# Altium PCB PCB2.PcbDoc
Units mm, origin at the board's own origin, x right, y up, seen from the top; angles counter-clockwise.
Board outline 152.4 x 101.6 mm, 2 copper layers (Top Layer, Bottom Layer); 31 components, 24 nets, 94 pads, 0 vias.
Unrouted connection lines stored in the file: 10.
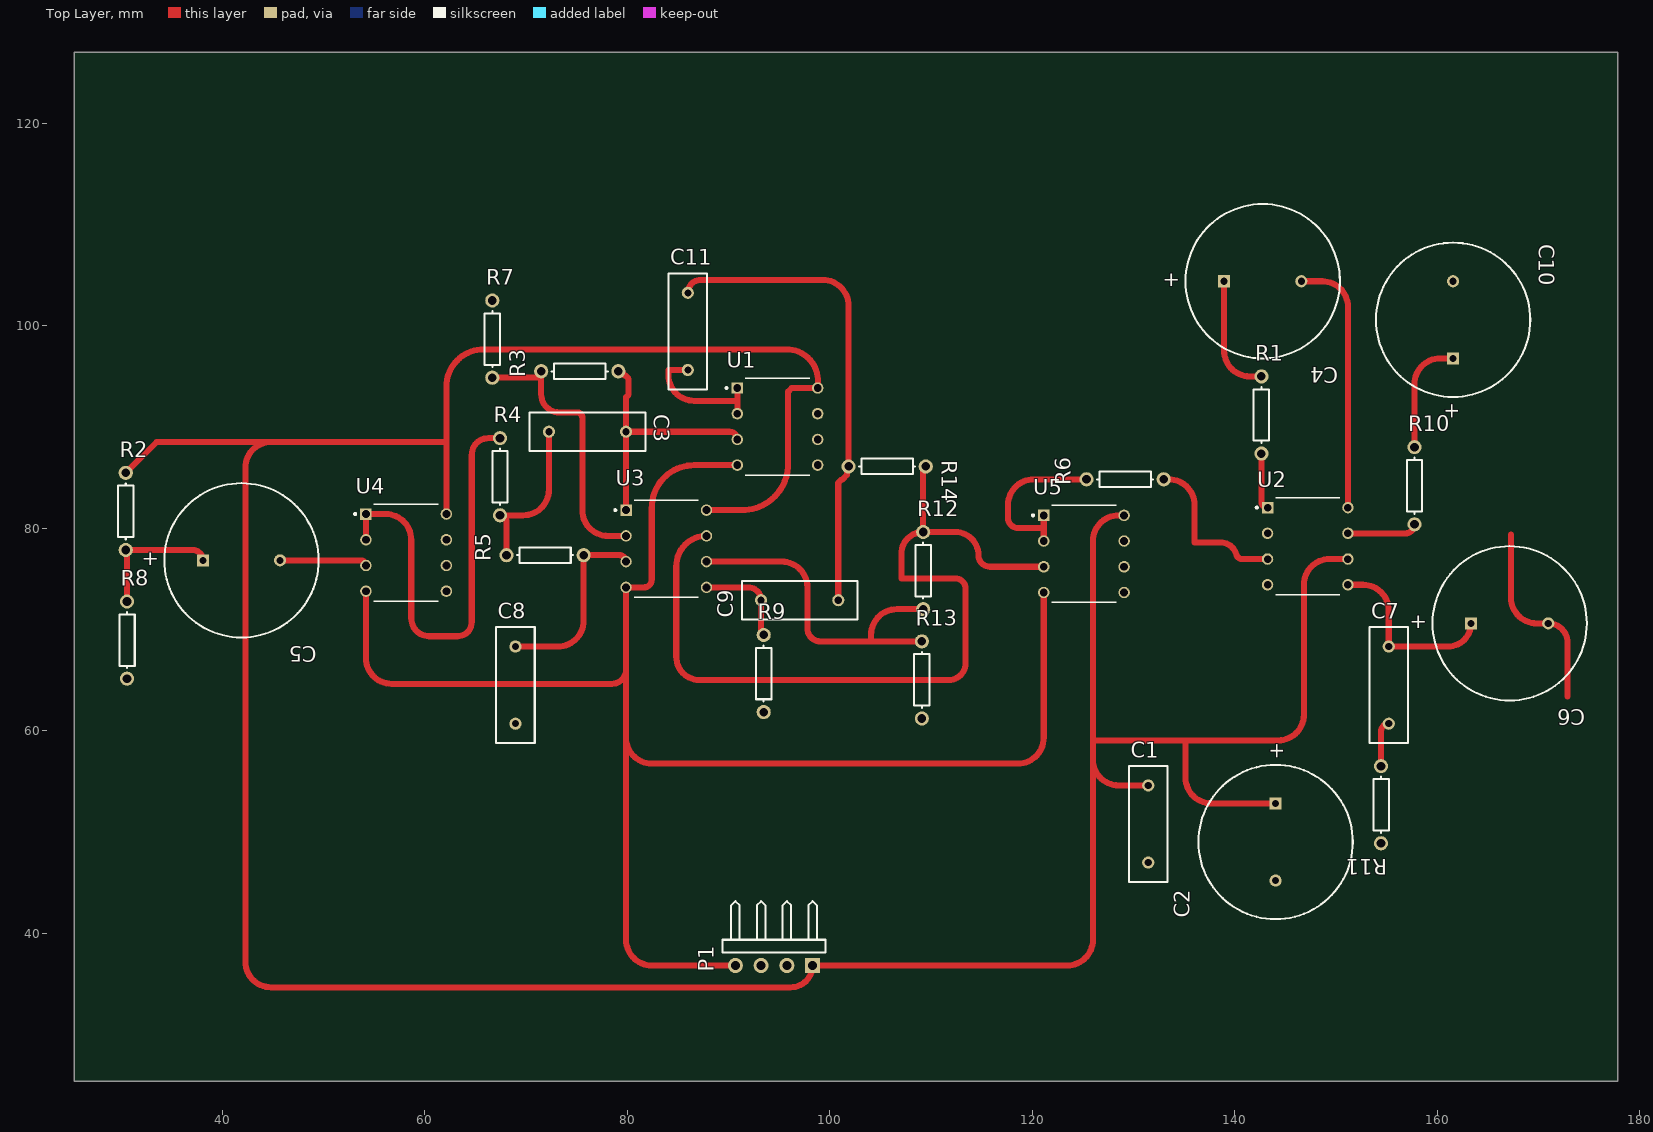
[diagram p0: Top Layer view]
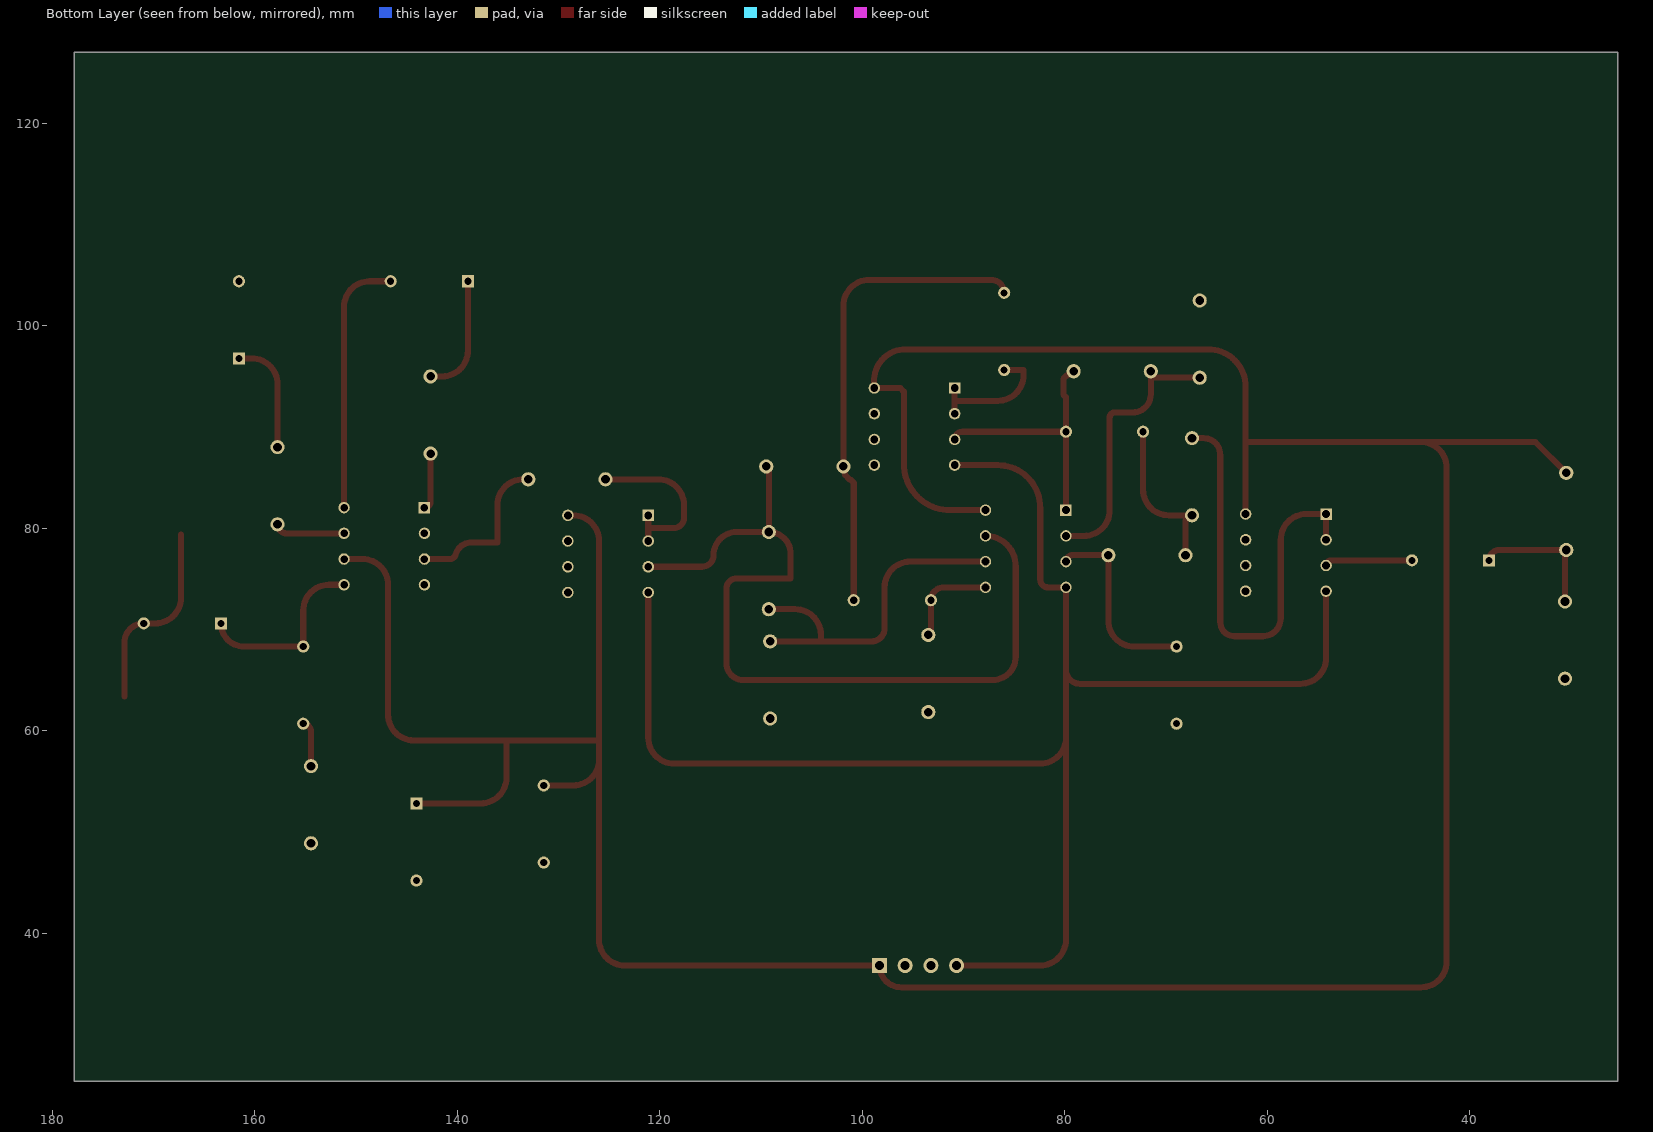
[diagram p1: Bottom Layer view, seen from below]

## Layer stack, top to bottom
Top Solder: solder mask 0.0102, Solder Resist, Dk 3.5
Top Layer: signal copper 0.0356
Dielectric 1: dielectric 0.32, FR-4, Dk 4.8
Bottom Layer: signal copper 0.0356
Bottom Solder: solder mask 0.0102, Solder Resist, Dk 3.5

## Board outline
25.4,25.4 177.8,25.4 177.8,127 25.4,127

## Design rules (kind name [scope] priority, off if disabled: settings)
Clearance [All] p1: gap=0.254 ignorepadtopadclearanceinfootprint=FALSE except(0: Arc-Hole Track-Hole SMDPad-Hole THPad-Hole Via-Hole Fill-Hole Poly-Hole Region-Hole Text-Hole; 1.3: Arc-Fill Arc-Poly Arc-Region Track-Fill Track-Poly Track-Region)
HoleSize [All] p1: absolutevalues=TRUE maxlimit=4 minlimit=3 maxpercent=80.000 minpercent=20.000
HoleToHoleClearance [All] p1: gap=0.3 allowstackedmicrovias=TRUE
PolygonConnect [All] p1: connectstyle=Relief reliefconductorwidth=0.254 reliefentries=4 polygonreliefangle="90 Angle" airgapwidth=0.254
RoutingVias [All] p1: holewidth=0.711 width=1.27 viastyle="Through Hole" minholewidth=0.711 minwidth=1.27 maxholewidth=0.711 maxwidth=1.27
SolderMaskExpansion [All] p1: expansion=0.102 istentingtop=FALSE
Width [All] p1: maxlimit=1.3 minlimit=0.254 preferedwidth=1.3 bottomlayer_maxwidth=0.254 bottomlayer_prefwidth=0.254 minimp=50.000000 maximp=50.000000 favimp=50.000000
28 further rules are at their usual default settings.

## Components (designator, comment, footprint, x,y, rotation, side; value= is the part's Value field where it differs from the comment)
C1 "Cap" RAD-0.3 131.445,50.8 r90 top value=100pF
C2 "Cap Pol1" RB7.6-15 144.018,49.022 r90 top value=100pF
C3 "Cap" RAD-0.3 76.073,89.535 r0 top value=100pF
C4 "Cap Pol1" RB7.6-15 142.748,104.394 r180 top value=100pF
C5 "Cap Pol1" RB7.6-15 41.91,76.835 r180 top value=100pF
C6 "Cap Pol1" RB7.6-15 167.132,70.612 r180 top value=100pF
C7 "Cap" RAD-0.3 155.194,64.516 r90 top value=100pF
C8 "Cap" RAD-0.3 68.961,64.516 r90 top value=100pF
C9 "Cap" RAD-0.3 97.028,72.898 r180 top value=100pF
C10 "Cap Pol1" RB7.6-15 161.544,100.584 r270 top value=100pF
C11 "Cap" RAD-0.3 85.979,99.441 r90 top value=100pF
P1 "Header 4H" HDR1X4H 98.298,36.83 r180 top
R1 "Res1" AXIAL-0.3 142.621,91.186 r90 top value=1K
R2 "Res1" AXIAL-0.3 30.48,81.661 r90 top value=1K
R3 "Res1" AXIAL-0.3 75.311,95.504 r180 top value=1K
R4 "Res1" AXIAL-0.3 67.437,85.09 r90 top value=1K
R5 "Res1" AXIAL-0.3 71.882,77.343 r180 top value=1K
R6 "Res1" AXIAL-0.3 129.159,84.836 r180 top value=1K
R7 "Res1" AXIAL-0.3 66.675,98.679 r90 top value=1K
R8 "Res1" AXIAL-0.3 30.607,68.961 r90 top value=1K
R9 "Res1" AXIAL-0.3 93.472,65.659 r90 top value=1K
R10 "Res1" AXIAL-0.3 157.734,84.201 r90 top value=1K
R11 "Res1" AXIAL-0.3 154.432,52.705 r270 top value=1K
R12 "Res1" AXIAL-0.3 109.22,75.819 r90 top value=1K
R13 "Res1" AXIAL-0.3 109.093,65.024 r90 top value=1K
R14 "Res1" AXIAL-0.3 105.664,86.106 r0 top value=1K
U1 "LM358PE3" DIP794W45P254L959H508Q8#1 94.836,90.043 r0 top
U2 "LM386N-3/NOPB" DIP794W45P254L959H508Q8#2 147.193,78.232 r0 top
U3 "TL072BCP" DIP794W45P254L959H508Q8#1 83.853,77.978 r0 top
U4 "LM358PE3" DIP794W45P254L959H508Q8#1 58.166,77.597 r0 top
U5 "LM358PE3" DIP794W45P254L959H508Q8#1 125.095,77.47 r0 top

## Footprints (in the part's own frame and the unit in brackets; to place one, negate y for a bottom-side part, rotate by r counter-clockwise, add the part's x,y. Pads: shape width x height; smd on the part's side, far side on the other; paste and mask are expansions set on the pad)
AXIAL-0.3 [mm] "Axial Device, Thru-Hole; 2 Leads; 0.3 in Pin Spacing"
  round 1.4 hole 0.85: 1(-3.81,0) 2(3.81,0)
  silkscreen extent -2.77,-0.76 2.77,0.76
DIP794W45P254L959H508Q8#1 [mm]
  rect 1.13x1.13 hole 0.78: 1(-3.97,3.81)
  round 1.13 hole 0.78: 2(-3.97,1.27) 3(-3.97,-1.27) 4(-3.97,-3.81) 5(3.97,-3.81) 6(3.97,-1.27) 7(3.97,1.27) 8(3.97,3.81)
  silkscreen extent -5.13,-4.8 3.17,4.8
DIP794W45P254L959H508Q8#2 [mm]
  rect 1.13x1.13 hole 0.74: 1(-3.97,3.81)
  round 1.13 hole 0.74: 2(-3.97,1.27) 3(-3.97,-1.27) 4(-3.97,-3.81) 5(3.97,-3.81) 6(3.97,-1.27) 7(3.97,1.27) 8(3.97,3.81)
  silkscreen extent -5.13,-4.8 3.17,4.8
HDR1X4H [mm] "Connector; Header; 4 Position; Right Angle"
  rect 1.5x1.5 hole 0.9: 1(0,0)
  round 1.5 hole 0.9: 2(2.54,0) 3(5.08,0) 4(7.62,0)
  silkscreen extent -1.27,-6.35 8.89,-1.27
RAD-0.3 [mm] "Radial Cap, Thru-Hole; 2 Leads; 0.3 in Pin Spacing"
  round 1.2 hole 0.7: 1(-3.81,0) 2(3.81,0)
  silkscreen extent -5.71,-1.91 5.71,1.91
RB7.6-15 [mm] "Polarized Capacitor (Radial); 2 Leads"
  rect 1.2x1.2 hole 0.7: 1(3.81,0)
  round 1.2 hole 0.7: 2(-3.81,0)
  silkscreen extent -7.62,-7.62 7.62,7.62

## Part data
C1 C3 C7 C8 C9 C11: "Capacitor", LatestRevisionDate=17-Jul-2002, LatestRevisionNote="Re-released for DXP Platform.", PackageDescription="Radial Cap, Thru-Hole; 2 Leads; 0.3 in Pin Spacing", PackageReference=RAD-0.3, Published=8-Jun-2000, Publisher="Altium Limited"
C2 C4 C5 C6 C10: "Polarized Capacitor (Radial)", LatestRevisionDate=17-Jul-2002, LatestRevisionNote="Re-released for DXP Platform.", PackageDescription="Polarized Capacitor (Radial); 2 Leads", PackageReference=RB7.6-15, Published=8-Jun-2000, Publisher="Altium Limited"
P1: "Header, 4-Pin, Right Angle", LatestRevisionDate=17-Jul-2002, LatestRevisionNote="Re-released for DXP Platform.", Publisher="Altium Limited"
R1 R2 R3 R4 R5 R6 R7 R8 R9 R10 R11 R12 R13 R14: "Resistor", LatestRevisionDate=17-Jul-2002, LatestRevisionNote="Re-released for DXP Platform.", PackageDescription="Axial Device, Thru-Hole; 2 Leads; 0.3 in Pin Spacing", PackageReference=AXIAL-0.3, Published=8-Jun-2000, Publisher="Altium Limited"
U1 U2 U4 U5: Package=None, Availability=Unavailable, Price=None
  U1 U4 U5: MP=LM358PE3
  U2: MP=LM386N-3/NOPB
U3: "Dual low-noise JFET-input low offset operational amplifier 8-PDIP 0 to 70", Package="PDIP-8 Texas", Availability=Warning, Check_prices=https://www.snapeda.com/parts/TL072BCP/Texas%20Instruments/view-part/511536/?ref=eda, MF="Texas Instruments", MP=TL072BCP, Price=None, Purchase-URL=https://pricing.snapeda.com/search/part/TL072BCP/?ref=eda, SnapEDA_Link=https://www.snapeda.com/parts/TL072BCP/Texas%20Instruments/view-part/511536/?ref=snap

## Nets (pads, with @x,y where several pads share a name; then routed paths per layer and width w, separated by ;. In a path a pad name is that pad's centre, name@x,y a point inside that pad or via, vN(x,y) a via of type N, cw(c..) or ccw(c..) an arc to the next point about the centre after c; other vN are vias at no path point)
GND: C1.1 C2.2 C8.1 C10.2 R7.2 R8.1 R9.1 R11.2 R13.1 U2.2 U2.4
NetC1_2: C1.2 C2.1 P1.1 R2.2 U1.8 U2.6 U3.8 U4.8 U5.8 | length 415.8
  Top Layer w0.6: R2.2 33.528,88.519 44.831,88.519 ; U4.8 62.136,88.519 ; U3.8 91.313,81.788 ; U1.8 96.236,93.853 95.885,93.502 95.885,86.36 ; U5.8 U5.8@128.524,81.28 ; C1.2 128.524,54.61 ; C2.1 137.668,52.832 ; U2.6 149.352,76.962 ; 42.291,37.211 ccw(c44.831,37.211) 44.831,34.671 ; 42.291,37.211 ccw(c44.831,37.211) 44.831,34.671 ; 42.291,37.211 42.291,85.979 ; 42.291,85.979 cw(c44.831,85.979) 44.831,88.519 ; 42.291,85.979 cw(c44.831,85.979) 44.831,88.519 ; 44.831,34.671 96.139,34.671 ; 44.831,88.519 62.136,88.519 ; 62.136,88.519 62.136,93.98 ; 62.136,93.98 cw(c65.819,93.98) 65.819,97.663 ; 62.136,93.98 cw(c65.819,93.98) 65.819,97.663 ; 65.819,97.663 95.742,97.663 ; 91.313,81.788 ccw(c91.313,86.36) 95.885,86.36 ; 91.313,81.788 ccw(c91.313,86.36) 95.885,86.36 ; 95.742,97.663 cw(c95.742,94.574) 98.749,93.867 ccw(c95.742,94.574) 95.742,97.663 ; 96.139,34.671 ccw(c96.139,36.83) P1.1 ; 96.139,34.671 ccw(c96.139,36.83) P1.1 ; P1.1 123.444,36.83 ; 123.444,36.83 ccw(c123.444,39.37) 125.984,39.37 ; 123.444,36.83 ccw(c123.444,39.37) 125.984,39.37 ; 125.984,39.37 125.984,57.15 ; 125.984,57.15 ccw(c128.524,57.15) 128.524,54.61 ; 125.984,57.15 ccw(c128.524,57.15) 128.524,54.61 ; 125.984,57.15 125.984,59.055 ; 125.984,59.055 125.984,78.74 ; 125.984,59.055 135.128,59.055 ; 125.984,78.74 cw(c128.524,78.74) U5.8@128.524,81.28 ; 125.984,78.74 cw(c128.524,78.74) U5.8@128.524,81.28 ; 125.984,78.74 cw(c128.524,78.74) U5.8@128.524,81.28 ; 125.984,78.74 cw(c128.524,78.74) U5.8@128.524,81.28 ; 135.128,55.372 ccw(c137.668,55.372) 137.668,52.832 ; 135.128,55.372 ccw(c137.668,55.372) 137.668,52.832 ; 135.128,55.372 135.128,59.055 ; 135.128,59.055 144.272,59.055 ; 144.272,59.055 ccw(c144.272,61.595) 146.812,61.595 ; 144.272,59.055 ccw(c144.272,61.595) 146.812,61.595 ; 146.812,61.595 146.812,74.422 ; 146.812,74.422 cw(c149.352,74.422) 149.352,76.962 ; 146.812,74.422 cw(c149.352,74.422) 149.352,76.962
NetC3_1: C3.1 R4.1 R5.2 | length 21.3
  Top Layer w0.6: R5.2 68.072,80.645 ; C3.1 72.263,83.82 ; R4.1 cw(c67.437,80.645) 68.072,80.645 ; R4.1 cw(c67.437,80.645) 68.072,80.645 ; R4.1 69.723,81.28 ; 69.723,81.28 ccw(c69.723,83.82) 72.263,83.82 ; 69.723,81.28 ccw(c69.723,83.82) 72.263,83.82
NetC3_2: C3.2 R3.1 U1.3 U3.1 | length 27
  Top Layer w0.6: R3.1 79.337,95.504 79.736,95.106 79.786,95.106 80.137,94.754 80.137,93.196 79.883,92.942 79.883,92.837 C3.2 ; U3.1 C3.2 ; C3.2 90.104,89.535 ; 90.104,89.535 cw(c90.104,88.773) U1.3 ccw(c90.104,88.773) 90.104,89.535
NetC4_1: C4.1 R1.2 | length 16
  Top Layer w0.6: C4.1 138.938,97.536 ; R1.2 141.478,94.996 ; 138.938,97.536 ccw(c141.478,97.536) 141.478,94.996 ; 138.938,97.536 ccw(c141.478,97.536) 141.478,94.996
NetC4_2: C4.2 U2.8 | length 29.9
  Top Layer w0.6: C4.2 148.623,104.394 ; U2.8 151.163,101.854 ; 148.623,104.394 cw(c148.623,101.854) 151.163,101.854 ; 148.623,104.394 cw(c148.623,101.854) 151.163,101.854
NetC5_1: C5.1 R2.1 R8.2 | length 15.1
  Top Layer w0.6: R8.2 R2.1@30.607,77.724 ; R2.1 cw(c30.48,77.724) R2.1@30.607,77.724 ; R2.1 cw(c30.48,77.724) 30.513,77.847 cw(c30.48,77.724) R2.1@30.607,77.724 ; R2.1 37.084,77.851 ; 37.084,77.851 cw(c37.084,76.835) C5.1 ccw(c37.084,76.835) 37.084,77.851
NetC5_2: C5.2 U4.3 | length 9.6
  Top Layer w0.6: C5.2 53.688,76.835 ; 53.688,76.835 cw(c53.688,76.327) U4.3 ccw(c53.688,76.327) 53.688,76.835
NetC6_1: C6.1 C7.2 U2.5 | length 26.1
  Top Layer w0.6: U2.5 152.654,74.422 ; 152.654,74.422 cw(c152.654,71.882) 155.194,71.882 ; 152.654,74.422 cw(c152.654,71.882) 155.194,71.882 ; 155.194,71.882 C7.2 161.036,68.326 ; 161.036,68.326 ccw(c161.036,70.612) C6.1 cw(c161.036,70.612) 161.036,68.326
NetC7_1: C7.1 R11.1 | length 5.8
  Top Layer w0.6: R11.1 154.432,59.944 ; 154.432,59.944 cw(c155.194,59.944) C7.1 ccw(c155.194,59.944) 154.432,59.944
NetC8_2: C8.2 R5.1 U3.3 | length 23.4
  Top Layer w0.6: C8.2 73.152,68.326 ; 75.692,76.581 75.692,70.866 ; R5.1 79.248,77.343 ; 73.152,68.326 ccw(c73.152,70.866) 75.692,70.866 ; 73.152,68.326 ccw(c73.152,70.866) 75.692,70.866 ; 79.248,77.343 cw(c79.248,76.708) U3.3 ccw(c79.248,76.708) 79.248,77.343
NetC9_1: C9.1 C11.2 R14.1 | length 53.6
  Top Layer w0.6: C9.1 100.838,84.485 101.189,84.836 101.259,84.836 101.701,85.278 101.701,85.953 R14.1 101.854,101.981 ; 87.249,104.521 ccw(c87.249,103.251) C11.2 cw(c87.249,103.251) 87.249,104.521 ; 87.249,104.521 99.314,104.521 ; 99.314,104.521 cw(c99.314,101.981) 101.854,101.981 ; 99.314,104.521 cw(c99.314,101.981) 101.854,101.981
NetC9_2: C9.2 R9.2 U3.5 | length 9.7
  Top Layer w0.6: U3.5 91.948,74.168 cw(c91.948,72.898) C9.2 93.218,69.723 ccw(c93.472,69.723) R9.2
NetC10_1: C10.1 R10.2 | length 15.5
  Top Layer w0.6: R10.2 157.734,94.234 ; C10.1 160.274,96.774 ; 157.734,94.234 cw(c160.274,94.234) 160.274,96.774 ; 157.734,94.234 cw(c160.274,94.234) 160.274,96.774
NetC11_1: C11.1 U1.1 U1.2 | length 17.2
  Top Layer w0.6: C11.1 84.074,95.631 84.074,95.123 ; U1.2 90.866,92.583 ; U1.1 90.866,92.583 ; 84.074,95.123 ccw(c86.614,95.123) 86.614,92.583 ; 84.074,95.123 ccw(c86.614,95.123) 86.614,92.583 ; 86.614,92.583 90.866,92.583
NetP1_4: P1.4 U1.4 U3.4 U4.4 U5.4 | length 223.2
  Top Layer w0.6: U4.4 54.196,67.183 ; P1.4 82.423,36.83 ; U1.4 86.614,86.233 ; U5.4 121.125,59.309 ; 54.196,67.183 ccw(c56.736,67.183) 56.736,64.643 ; 54.196,67.183 ccw(c56.736,67.183) 56.736,64.643 ; 54.196,67.183 ccw(c56.736,67.183) 56.736,64.643 ; 54.196,67.183 ccw(c56.736,67.183) 56.736,64.643 ; 56.736,64.643 78.486,64.643 ; 78.486,64.643 ccw(c78.486,66.04) 79.883,66.04 ; 78.486,64.643 ccw(c78.486,66.04) 79.883,66.04 ; 78.486,64.643 ccw(c78.486,66.04) 79.883,66.04 ; 78.486,64.643 ccw(c78.486,66.04) 79.883,66.04 ; 79.883,39.37 ccw(c82.423,39.37) 82.423,36.83 ; 79.883,39.37 ccw(c82.423,39.37) 82.423,36.83 ; 79.883,39.37 ccw(c82.423,39.37) 82.423,36.83 ; 79.883,39.37 ccw(c82.423,39.37) 82.423,36.83 ; 79.883,39.37 79.883,59.309 ; 79.883,59.309 ccw(c82.423,59.309) 82.423,56.769 ; 79.883,59.309 ccw(c82.423,59.309) 82.423,56.769 ; 79.883,59.309 ccw(c82.423,59.309) 82.423,56.769 ; 79.883,59.309 ccw(c82.423,59.309) 82.423,56.769 ; 79.883,59.309 79.883,66.04 ; 79.883,66.04 U3.4 81.661,74.168 ; 81.661,74.168 ccw(c81.661,74.93) 82.423,74.93 ; 81.661,74.168 ccw(c81.661,74.93) 82.423,74.93 ; 82.423,56.769 118.585,56.769 ; 82.423,74.93 82.423,82.042 ; 82.423,82.042 cw(c86.614,82.042) 86.614,86.233 ; 82.423,82.042 cw(c86.614,82.042) 86.614,86.233 ; 118.585,56.769 ccw(c118.585,59.309) 121.125,59.309 ; 118.585,56.769 ccw(c118.585,59.309) 121.125,59.309 ; 118.585,56.769 ccw(c118.585,59.309) 121.125,59.309 ; 118.585,56.769 ccw(c118.585,59.309) 121.125,59.309
NetR1_1: R1.1 U2.1 | length 6.6
  Top Layer w0.6: R1.1 142.621,82.644 ; 142.621,82.644 ccw(c143.223,82.644) U2.1 cw(c143.223,82.644) 142.621,82.644
NetR3_2: R3.2 R7.1 U3.2 | length 27.8
  Top Layer w0.6: R7.1 70.866,94.869 ccw(c70.866,95.504) R3.2 71.501,93.218 ccw(c73.279,93.218) 73.279,91.44 75.057,91.44 cw(c75.057,90.932) 75.565,90.932 75.565,81.788 ccw(c78.105,81.788) 78.105,79.248 U3.2
NetR4_2: R4.2 U4.1 U4.2 | length 55.8
  Top Layer w0.6: U4.2 U4.1 56.134,81.407 ; R4.2 66.294,88.9 ; 56.134,81.407 cw(c56.134,78.867) 58.674,78.867 ; 56.134,81.407 cw(c56.134,78.867) 58.674,78.867 ; 58.674,71.12 ccw(c60.452,71.12) 60.452,69.342 ; 58.674,71.12 ccw(c60.452,71.12) 60.452,69.342 ; 58.674,71.12 58.674,78.867 ; 60.452,69.342 63.246,69.342 ; 63.246,69.342 ccw(c63.246,70.739) 64.643,70.739 ; 63.246,69.342 ccw(c63.246,70.739) 64.643,70.739 ; 64.643,70.739 64.643,87.249 ; 64.643,87.249 cw(c66.294,87.249) 66.294,88.9 ; 64.643,87.249 cw(c66.294,87.249) 66.294,88.9
NetR6_1: R6.1 U2.3 | length 22.3
  Top Layer w0.6: R6.1 R6.1@133.477,84.836 ; U2.3 140.727,76.962 140.559,76.962 140.416,77.048 cw(c140.727,77.562) 140.149,77.4 ; R6.1@133.477,84.836 cw(c133.477,82.296) 136.017,82.296 ; R6.1@133.477,84.836 cw(c133.477,82.296) 136.017,82.296 ; 136.017,82.296 136.017,78.613 138.557,78.613 ; 138.557,78.613 cw(c138.557,76.962) 140.149,77.4 ; 138.557,78.613 cw(c138.557,76.962) 140.149,77.4
NetR6_2: R6.2 U5.1 U5.2 | length 22.7
  Top Layer w0.6: U5.2 121.125,80.01 ; U5.1 121.125,80.01 ; R6.2 120.142,84.836 ; 117.602,81.026 ccw(c118.618,81.026) 118.618,80.01 ; 117.602,81.026 ccw(c118.618,81.026) 118.618,80.01 ; 117.602,81.026 117.602,82.296 ; 117.602,82.296 cw(c120.142,82.296) 120.142,84.836 ; 117.602,82.296 cw(c120.142,82.296) 120.142,84.836 ; 118.618,80.01 121.125,80.01
NetR10_1: R10.1 U2.7 | length 8.5
  Top Layer w0.6: U2.7 156.845,79.502 ; 156.845,79.502 ccw(c156.845,80.391) R10.1 cw(c156.845,80.391) 156.845,79.502
NetR12_1: R12.1 R13.2 U3.6 | length 44.7
  Top Layer w0.6: U3.6 95.25,76.708 ; R13.2 104.076,68.834 ; R12.1 106.617,72.009 ; 95.25,76.708 cw(c95.25,74.168) 97.79,74.168 ; 95.25,76.708 cw(c95.25,74.168) 97.79,74.168 ; 97.79,70.104 ccw(c99.06,70.104) 99.06,68.834 ; 97.79,70.104 ccw(c99.06,70.104) 99.06,68.834 ; 97.79,70.104 97.79,74.168 ; 99.06,68.834 104.076,68.834 ; 104.076,68.834 104.076,69.469 ; 104.076,69.469 cw(c106.617,69.469) 106.617,72.009 ; 104.076,69.469 cw(c106.617,69.469) 106.617,72.009
NetR12_2: R12.2 R14.2 U3.7 U5.3 | length 106.3
  Top Layer w0.6: R14.2 109.474,85.89 109.22,85.636 R12.2 ; U5.3 115.824,76.2 ; 84.836,67.31 ccw(c87.122,67.31) 87.122,65.024 ; 84.836,67.31 ccw(c87.122,67.31) 87.122,65.024 ; 84.836,67.31 84.836,76.261 ; 84.836,76.261 cw(c87.823,76.261) U3.7 ccw(c87.823,76.261) 84.836,76.261 ; 87.122,65.024 111.76,65.024 ; 107.061,77.47 cw(c109.22,77.47) R12.2 ; 107.061,77.47 cw(c109.22,77.47) R12.2 ; 107.061,77.47 107.061,75.057 112.395,75.057 ; R12.2 112.395,79.629 ; 111.76,65.024 ccw(c111.76,66.675) 113.411,66.675 ; 111.76,65.024 ccw(c111.76,66.675) 113.411,66.675 ; 112.395,75.057 cw(c112.395,74.041) 113.411,74.041 ; 112.395,75.057 cw(c112.395,74.041) 113.411,74.041 ; 112.395,79.629 cw(c112.395,77.343) 114.681,77.343 ; 112.395,79.629 cw(c112.395,77.343) 114.681,77.343 ; 113.411,66.675 113.411,74.041 ; 114.681,77.343 ccw(c115.824,77.343) 115.824,76.2 ; 114.681,77.343 ccw(c115.824,77.343) 115.824,76.2
pads on no net: C6.2 P1.2 P1.3 U1.5 U1.6 U1.7 U4.5 U4.6 U4.7 U5.5 U5.6 U5.7
copper on no net: | length 19.7
  Top Layer w0.6: 167.259,79.375 167.259,79.248 167.259,73.152 ccw(c169.799,73.152) 169.799,70.612 170.942,70.612 cw(c170.942,68.707) 172.847,68.707 172.847,63.373

## Text inside footprints (layer, text, board x,y; h text height)
C2: Top Overlay "+" at 144.755,57.154 h1.5 r90
C4: Top Overlay "+" at 134.616,105.131 h1.5 r180
C5: Top Overlay "+" at 33.778,77.572 h1.5 r180
C6: Top Overlay "+" at 159,71.349 h1.5 r180
C10: Top Overlay "+" at 160.807,92.452 h1.5 r270